# EAGLE board 1-WireCounterPanelized (EAGLE 6.5.0)
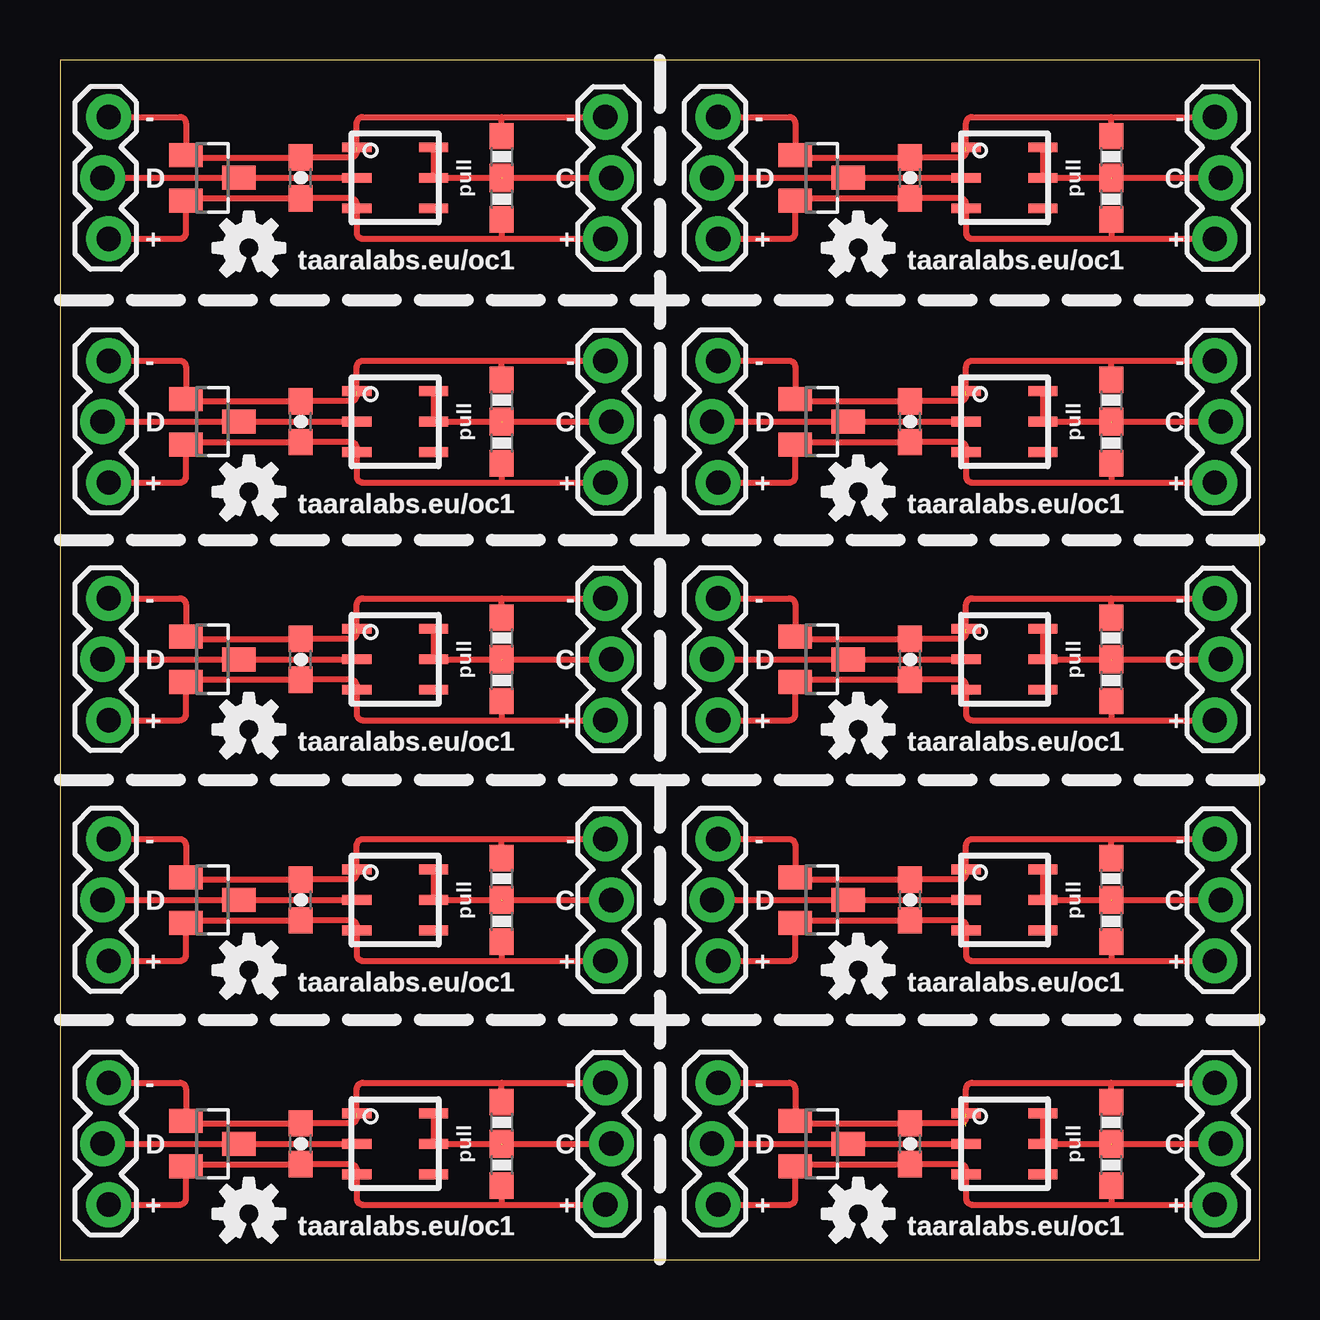
[diagram p0: board, top side]
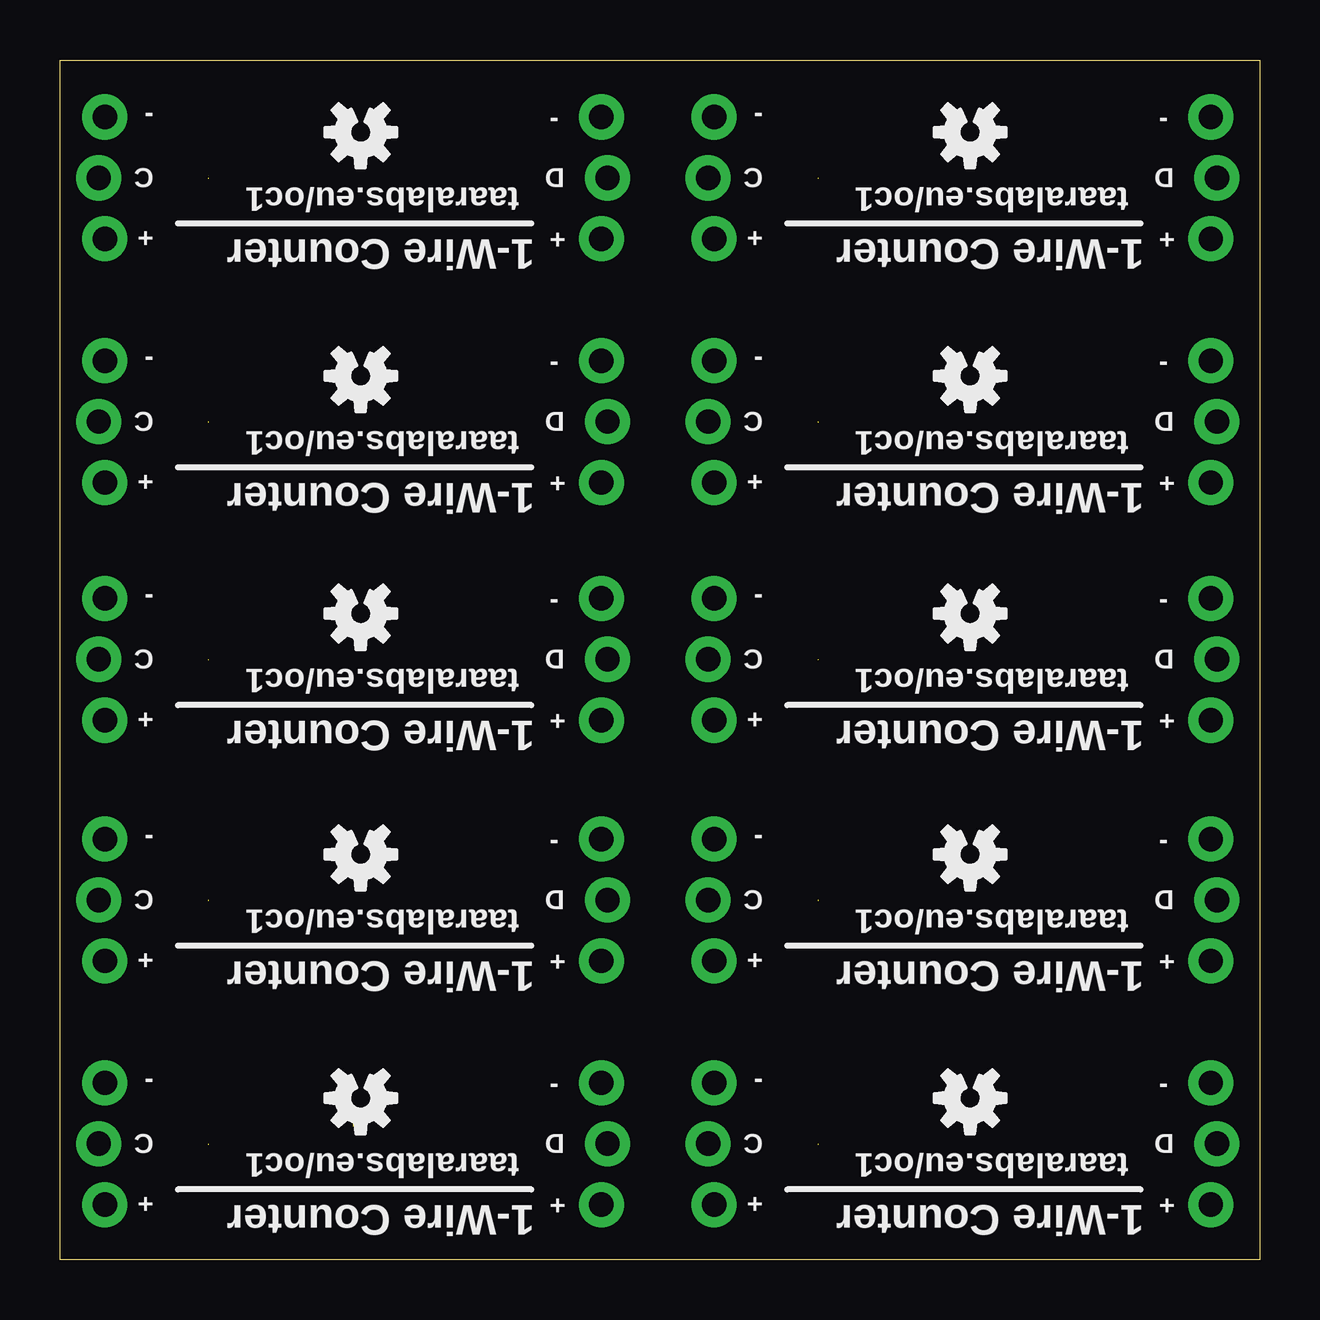
[diagram p1: board, bottom side, seen from below]

Size 50 x 50 mm. Coordinates in mm from the lower left corner, seen from the top.
Outline: 50,0 50,50 0,50 0,0 50,0
Copper layers (1*16): Top 0.035mm / dielectric 1.5mm / Bottom 0.035mm
Design rules "default": minimum track width 10mil, minimum drill 24mil, track to track 8mil, track to pad 8mil, pad to pad 8mil, via to via 8mil, smd to smd 8mil, copper to edge 40mil, drill to drill 8mil, minimum pad ring 10mil, minimum via ring 8mil, stop-mask expansion 4mil, vias tented up to drill 0mil, thermal gap 10mil

## Footprints (pad centres in the part's own frame; a part is rotated, then mirrored left to right if it is on the bottom)
0603-CAP = smd 1.1 x 1: 1 -0.85,0; 2 0.85,0
SOT23 = smd 1 x 1.4: 1 -0.95,-1.1; 2 0.95,-1.1; 3 0,1.1
1X03_LOCK = drill 1.016 pad 1.88: 1 0,0.127; 2 2.54,-0.127; 3 5.08,0.127
0603-RES = smd 1.1 x 1: 1 -0.85,0; 2 0.85,0
TSOC6 = smd 0.406 x 1.219: 1 -1.27,-1.6; 2 0,-1.6; 3 1.27,-1.6; 4 1.27,1.6; 5 0,1.6; 6 -1.27,1.6

## Placement (x,y rotation side)
C1  10u  [0603-CAP]  35.43,4.83 90 top
C2  10u  [0603-CAP]  10.03,4.83 90 top
C3  10u  [0603-CAP]  10.03,14.99 90 top
C4  10u  [0603-CAP]  35.43,14.99 90 top
C5  10u  [0603-CAP]  10.03,25.02 90 top
C6  10u  [0603-CAP]  10.03,34.92 90 top
C7  10u  [0603-CAP]  10.03,45.09 90 top
C8  10u  [0603-CAP]  35.43,25.02 90 top
C9  10u  [0603-CAP]  35.43,34.92 90 top
C10  10u  [0603-CAP]  35.43,45.09 90 top
D1  BAT54S  [SOT23]  6.35,4.83 270 top
D2  BAT54S  [SOT23]  31.75,4.83 270 top
D3  BAT54S  [SOT23]  6.35,14.99 270 top
D4  BAT54S  [SOT23]  31.75,14.99 270 top
D5  BAT54S  [SOT23]  6.35,25.02 270 top
D6  BAT54S  [SOT23]  6.35,34.92 270 top
D7  BAT54S  [SOT23]  6.35,45.09 270 top
D8  BAT54S  [SOT23]  31.75,25.02 270 top
D9  BAT54S  [SOT23]  31.75,34.92 270 top
D10  BAT54S  [SOT23]  31.75,45.09 270 top
JP1  [1X03_LOCK]  1.91,7.37 270 top
JP2  [1X03_LOCK]  22.86,2.29 90 top
JP3  [1X03_LOCK]  27.3,7.37 270 top
JP4  [1X03_LOCK]  48.26,2.29 90 top
JP5  [1X03_LOCK]  1.91,17.53 270 top
JP6  [1X03_LOCK]  22.86,12.45 90 top
JP7  [1X03_LOCK]  27.3,17.53 270 top
JP8  [1X03_LOCK]  48.26,12.45 90 top
JP9  [1X03_LOCK]  1.91,27.56 270 top
JP10  [1X03_LOCK]  22.86,22.48 90 top
JP11  [1X03_LOCK]  1.91,37.47 270 top
JP12  [1X03_LOCK]  22.86,32.38 90 top
JP13  [1X03_LOCK]  1.91,47.62 270 top
JP14  [1X03_LOCK]  22.86,42.55 90 top
JP15  [1X03_LOCK]  27.3,27.56 270 top
JP16  [1X03_LOCK]  48.26,22.48 90 top
JP17  [1X03_LOCK]  27.3,37.47 270 top
JP18  [1X03_LOCK]  48.26,32.38 90 top
JP19  [1X03_LOCK]  27.3,47.62 270 top
JP20  [1X03_LOCK]  48.26,42.55 90 top
R1  up  [0603-RES]  18.41,3.94 270 top
R2  down  [0603-RES]  18.41,5.71 270 top
R3  down  [0603-RES]  43.81,5.71 270 top
R4  up  [0603-RES]  43.81,3.94 270 top
R5  down  [0603-RES]  18.41,15.88 270 top
R6  up  [0603-RES]  18.41,14.1 270 top
R7  down  [0603-RES]  43.81,15.88 270 top
R8  up  [0603-RES]  43.81,14.1 270 top
R9  down  [0603-RES]  18.41,25.91 270 top
R10  up  [0603-RES]  18.41,24.13 270 top
R11  down  [0603-RES]  18.41,35.81 270 top
R12  up  [0603-RES]  18.41,34.04 270 top
R13  down  [0603-RES]  18.41,45.97 270 top
R14  up  [0603-RES]  18.41,44.2 270 top
R15  down  [0603-RES]  43.81,25.91 270 top
R16  up  [0603-RES]  43.81,24.13 270 top
R17  down  [0603-RES]  43.81,35.81 270 top
R18  up  [0603-RES]  43.81,34.04 270 top
R19  down  [0603-RES]  43.81,45.97 270 top
R20  up  [0603-RES]  43.81,44.2 270 top
U$1  [OSHW-LOGO-S]  7.87,1.91 0 top
U$2  DS2423P  [TSOC6]  13.97,4.83 270 top
U$3  [OSHW-LOGO-S]  12.06,6.73 180 bottom
U$4  DS2423P  [TSOC6]  39.37,4.83 270 top
U$5  [OSHW-LOGO-S]  33.27,1.91 0 top
U$6  [OSHW-LOGO-S]  37.47,6.73 180 bottom
U$7  DS2423P  [TSOC6]  13.97,14.99 270 top
U$8  [OSHW-LOGO-S]  7.87,12.06 0 top
U$9  [OSHW-LOGO-S]  12.06,16.89 180 bottom
U$10  DS2423P  [TSOC6]  39.37,14.99 270 top
U$11  [OSHW-LOGO-S]  33.27,12.06 0 top
U$12  [OSHW-LOGO-S]  37.47,16.89 180 bottom
U$13  DS2423P  [TSOC6]  13.97,25.02 270 top
U$14  [OSHW-LOGO-S]  7.87,22.1 0 top
U$15  [OSHW-LOGO-S]  12.06,26.92 180 bottom
U$16  DS2423P  [TSOC6]  13.97,34.92 270 top
U$17  [OSHW-LOGO-S]  7.87,32 0 top
U$18  [OSHW-LOGO-S]  12.06,36.83 180 bottom
U$19  DS2423P  [TSOC6]  13.97,45.09 270 top
U$20  [OSHW-LOGO-S]  7.87,42.16 0 top
U$21  [OSHW-LOGO-S]  12.06,46.99 180 bottom
U$22  DS2423P  [TSOC6]  39.37,25.02 270 top
U$23  [OSHW-LOGO-S]  33.27,22.1 0 top
U$24  [OSHW-LOGO-S]  37.47,26.92 180 bottom
U$25  DS2423P  [TSOC6]  39.37,34.92 270 top
U$26  [OSHW-LOGO-S]  33.27,32 0 top
U$27  [OSHW-LOGO-S]  37.47,36.83 180 bottom
U$28  DS2423P  [TSOC6]  39.37,45.09 270 top
U$29  [OSHW-LOGO-S]  33.27,42.16 0 top
U$30  [OSHW-LOGO-S]  37.47,46.99 180 bottom

## Library data of the parts
C1-C10 = SparkFun-Capacitors
D1-D10 = diode
JP1-JP20 = SparkFun
R1-R20 = SparkFun-Resistors
U$1 U$3 U$5 U$6 U$8 U$9 U$11 U$12 U$14 U$15 U$17 U$18 U$20 U$21 U$23 U$24 U$26 U$27 U$29 U$30 = SparkFun-Aesthetics
U$2 U$4 U$7 U$10 U$13 U$16 U$19 U$22 U$25 U$28 = 1wire

## Nets
GND: C2.2 D1.1 JP1.1 JP2.3 R2.1 U$2.1
GND1: C1.2 D2.1 JP3.1 JP4.3 R3.1 U$4.1
GND2: C3.2 D3.1 JP5.1 JP6.3 R5.1 U$7.1
GND3: C4.2 D4.1 JP7.1 JP8.3 R7.1 U$10.1
GND4: C5.2 D5.1 JP9.1 JP10.3 R9.1 U$13.1
GND5: C6.2 D6.1 JP11.1 JP12.3 R11.1 U$16.1
GND6: C7.2 D7.1 JP13.1 JP14.3 R13.1 U$19.1
GND7: C8.2 D8.1 JP15.1 JP16.3 R15.1 U$22.1
GND8: C9.2 D9.1 JP17.1 JP18.3 R17.1 U$25.1
GND9: C10.2 D10.1 JP19.1 JP20.3 R19.1 U$28.1
N$1: D1.3 JP1.2 U$2.2
N$2: D2.3 JP3.2 U$4.2
N$3: JP4.2 R3.2 R4.1 U$4.5 U$4.6
N$4: D3.3 JP5.2 U$7.2
N$5: JP2.2 R1.1 R2.2 U$2.5 U$2.6
N$6: JP6.2 R5.2 R6.1 U$7.5 U$7.6
N$7: D4.3 JP7.2 U$10.2
N$8: JP8.2 R7.2 R8.1 U$10.5 U$10.6
N$9: D5.3 JP9.2 U$13.2
N$10: JP10.2 R9.2 R10.1 U$13.5 U$13.6
N$11: D6.3 JP11.2 U$16.2
N$12: JP12.2 R11.2 R12.1 U$16.5 U$16.6
N$13: D7.3 JP13.2 U$19.2
N$14: JP14.2 R13.2 R14.1 U$19.5 U$19.6
N$15: D8.3 JP15.2 U$22.2
N$16: JP16.2 R15.2 R16.1 U$22.5 U$22.6
N$17: D9.3 JP17.2 U$25.2
N$18: JP18.2 R17.2 R18.1 U$25.5 U$25.6
N$19: D10.3 JP19.2 U$28.2
N$20: JP20.2 R19.2 R20.1 U$28.5 U$28.6
VCC: C2.1 D1.2 JP1.3 JP2.1 R1.2 U$2.3
VCC1: C1.1 D2.2 JP3.3 JP4.1 R4.2 U$4.3
VCC2: C3.1 D3.2 JP5.3 JP6.1 R6.2 U$7.3
VCC3: C4.1 D4.2 JP7.3 JP8.1 R8.2 U$10.3
VCC4: C5.1 D5.2 JP9.3 JP10.1 R10.2 U$13.3
VCC5: C6.1 D6.2 JP11.3 JP12.1 R12.2 U$16.3
VCC6: C7.1 D7.2 JP13.3 JP14.1 R14.2 U$19.3
VCC7: C8.1 D8.2 JP15.3 JP16.1 R16.2 U$22.3
VCC8: C9.1 D9.2 JP17.3 JP18.1 R18.2 U$25.3
VCC9: C10.1 D10.2 JP19.3 JP20.1 R20.2 U$28.3

## Tracks (layer width: path | path; a pad name or v marks a point on that pad's centre or on a via)
GND  (1 unrouted)
  Top 0.254: 12.37,5.93 arc-90 12.12,5.68 C2.2 5.35,5.68 arc-90 D1.1 5.25,7.11 arc90 5,7.37 JP1.1 | U$2.1 12.37,7.11 arc-90 12.62,7.37 18.41,7.37 | 18.41,7.37 JP2.3 | R2.1 18.41,7.37
GND1  (1 unrouted)
  Top 0.254: 37.77,5.93 arc-90 37.52,5.68 C1.2 30.75,5.68 arc-90 D2.1 30.65,7.11 arc90 30.4,7.37 JP3.1 | U$4.1 37.77,7.11 arc-90 38.02,7.37 43.81,7.37 | 43.81,7.37 JP4.3 | R3.1 43.81,7.37
GND2  (1 unrouted)
  Top 0.254: 12.37,16.09 arc-90 12.12,15.84 C3.2 5.35,15.84 arc-90 D3.1 5.25,17.27 arc90 5,17.53 JP5.1 | U$7.1 12.37,17.27 arc-90 12.62,17.53 18.41,17.53 | 18.41,17.53 JP6.3 | R5.1 18.41,17.53
GND3  (1 unrouted)
  Top 0.254: 37.77,16.09 arc-90 37.52,15.84 C4.2 30.75,15.84 arc-90 D4.1 30.65,17.27 arc90 30.4,17.53 JP7.1 | U$10.1 37.77,17.27 arc-90 38.02,17.53 43.81,17.53 | 43.81,17.53 JP8.3 | R7.1 43.81,17.53
GND4  (1 unrouted)
  Top 0.254: 12.37,26.12 arc-90 12.12,25.87 C5.2 5.35,25.87 arc-90 D5.1 5.25,27.3 arc90 5,27.56 JP9.1 | U$13.1 12.37,27.3 arc-90 12.62,27.56 18.41,27.56 | 18.41,27.56 JP10.3 | R9.1 18.41,27.56
GND5  (1 unrouted)
  Top 0.254: 12.37,36.03 arc-90 12.12,35.77 C6.2 5.35,35.77 arc-90 D6.1 5.25,37.21 arc90 5,37.47 JP11.1 | U$16.1 12.37,37.21 arc-90 12.62,37.47 18.41,37.47 | 18.41,37.47 JP12.3 | R11.1 18.41,37.47
GND6  (1 unrouted)
  Top 0.254: 12.37,46.19 arc-90 12.12,45.94 C7.2 5.35,45.94 arc-90 D7.1 5.25,47.37 arc90 5,47.62 JP13.1 | U$19.1 12.37,47.37 arc-90 12.62,47.62 18.41,47.62 | 18.41,47.62 JP14.3 | R13.1 18.41,47.62
GND7  (1 unrouted)
  Top 0.254: 37.77,26.12 arc-90 37.52,25.87 C8.2 30.75,25.87 arc-90 D8.1 30.65,27.3 arc90 30.4,27.56 JP15.1 | U$22.1 37.77,27.3 arc-90 38.02,27.56 43.81,27.56 | 43.81,27.56 JP16.3 | R15.1 43.81,27.56
GND8  (1 unrouted)
  Top 0.254: 37.77,36.03 arc-90 37.52,35.77 C9.2 30.75,35.77 arc-90 D9.1 30.65,37.21 arc90 30.4,37.47 JP17.1 | U$25.1 37.77,37.21 arc-90 38.02,37.47 43.81,37.47 | 43.81,37.47 JP18.3 | R17.1 43.81,37.47
GND9  (1 unrouted)
  Top 0.254: 37.77,46.19 arc-90 37.52,45.94 C10.2 30.75,45.94 arc-90 D10.1 30.65,47.37 arc90 30.4,47.62 JP19.1 | U$28.1 37.77,47.37 arc-90 38.02,47.62 43.81,47.62 | 43.81,47.62 JP20.3 | R19.1 43.81,47.62
N$1
  Top 0.254: JP1.2 D1.3 U$2.2
N$2
  Top 0.254: JP3.2 D2.3 U$4.2
N$3  (1 unrouted)
  Top 0.254: U$4.6 U$4.5 43.81,4.83 | 43.81,4.83 R3.2 | 43.81,4.83 JP4.2
N$4
  Top 0.254: JP5.2 D3.3 U$7.2
N$5  (1 unrouted)
  Top 0.254: U$2.6 U$2.5 18.41,4.83 | 18.41,4.83 R2.2 | 18.41,4.83 JP2.2
N$6  (1 unrouted)
  Top 0.254: U$7.6 U$7.5 18.41,14.99 | 18.41,14.99 R5.2 | 18.41,14.99 JP6.2
N$7
  Top 0.254: JP7.2 D4.3 U$10.2
N$8  (1 unrouted)
  Top 0.254: U$10.6 U$10.5 43.81,14.99 | 43.81,14.99 R7.2 | 43.81,14.99 JP8.2
N$9
  Top 0.254: JP9.2 D5.3 U$13.2
N$10  (1 unrouted)
  Top 0.254: U$13.6 U$13.5 18.41,25.02 | 18.41,25.02 R9.2 | 18.41,25.02 JP10.2
N$11
  Top 0.254: JP11.2 D6.3 U$16.2
N$12  (1 unrouted)
  Top 0.254: U$16.6 U$16.5 18.41,34.92 | 18.41,34.92 R11.2 | 18.41,34.92 JP12.2
N$13
  Top 0.254: JP13.2 D7.3 U$19.2
N$14  (1 unrouted)
  Top 0.254: U$19.6 U$19.5 18.41,45.09 | 18.41,45.09 R13.2 | 18.41,45.09 JP14.2
N$15
  Top 0.254: JP15.2 D8.3 U$22.2
N$16  (1 unrouted)
  Top 0.254: U$22.6 U$22.5 43.81,25.02 | 43.81,25.02 R15.2 | 43.81,25.02 JP16.2
N$17
  Top 0.254: JP17.2 D9.3 U$25.2
N$18  (1 unrouted)
  Top 0.254: U$25.6 U$25.5 43.81,34.92 | 43.81,34.92 R17.2 | 43.81,34.92 JP18.2
N$19
  Top 0.254: JP19.2 D10.3 U$28.2
N$20  (1 unrouted)
  Top 0.254: U$28.6 U$28.5 43.81,45.09 | 43.81,45.09 R19.2 | 43.81,45.09 JP20.2
S$1  (1 unrouted)
S$2  (1 unrouted)
VCC
  Top 0.254: JP1.3 5,2.29 arc90 5.25,2.54 D1.2 arc-90 5.35,3.98 C2.1 12.12,3.98 arc-90 12.37,3.72 U$2.3 12.37,2.54 arc90 12.62,2.29 18.41,2.29 | 18.41,2.29 JP2.1 | R1.2 18.41,2.29
VCC1
  Top 0.254: JP3.3 30.4,2.29 arc90 30.65,2.54 D2.2 arc-90 30.75,3.98 C1.1 37.52,3.98 arc-90 37.77,3.72 U$4.3 37.77,2.54 arc90 38.02,2.29 43.81,2.29 | 43.81,2.29 JP4.1 | R4.2 43.81,2.29
VCC2
  Top 0.254: JP5.3 5,12.45 arc90 5.25,12.7 D3.2 arc-90 5.35,14.14 C3.1 12.12,14.14 arc-90 12.37,13.88 U$7.3 12.37,12.7 arc90 12.62,12.45 18.41,12.45 | 18.41,12.45 JP6.1 | R6.2 18.41,12.45
VCC3
  Top 0.254: JP7.3 30.4,12.45 arc90 30.65,12.7 D4.2 arc-90 30.75,14.14 C4.1 37.52,14.14 arc-90 37.77,13.88 U$10.3 37.77,12.7 arc90 38.02,12.45 43.81,12.45 | 43.81,12.45 JP8.1 | R8.2 43.81,12.45
VCC4
  Top 0.254: JP9.3 5,22.48 arc90 5.25,22.73 D5.2 arc-90 5.35,24.17 C5.1 12.12,24.17 arc-90 12.37,23.91 U$13.3 12.37,22.73 arc90 12.62,22.48 18.41,22.48 | 18.41,22.48 JP10.1 | R10.2 18.41,22.48
VCC5
  Top 0.254: JP11.3 5,32.38 arc90 5.25,32.64 D6.2 arc-90 5.35,34.08 C6.1 12.12,34.08 arc-90 12.37,33.82 U$16.3 12.37,32.64 arc90 12.62,32.38 18.41,32.38 | 18.41,32.38 JP12.1 | R12.2 18.41,32.38
VCC6
  Top 0.254: JP13.3 5,42.55 arc90 5.25,42.8 D7.2 arc-90 5.35,44.23 C7.1 12.12,44.23 arc-90 12.37,43.98 U$19.3 12.37,42.8 arc90 12.62,42.55 18.41,42.55 | 18.41,42.55 JP14.1 | R14.2 18.41,42.55
VCC7
  Top 0.254: JP15.3 30.4,22.48 arc90 30.65,22.73 D8.2 arc-90 30.75,24.17 C8.1 37.52,24.17 arc-90 37.77,23.91 U$22.3 37.77,22.73 arc90 38.02,22.48 43.81,22.48 | 43.81,22.48 JP16.1 | R16.2 43.81,22.48
VCC8
  Top 0.254: JP17.3 30.4,32.38 arc90 30.65,32.64 D9.2 arc-90 30.75,34.08 C9.1 37.52,34.08 arc-90 37.77,33.82 U$25.3 37.77,32.64 arc90 38.02,32.38 43.81,32.38 | 43.81,32.38 JP18.1 | R18.2 43.81,32.38
VCC9
  Top 0.254: JP19.3 30.4,42.55 arc90 30.65,42.8 D10.2 arc-90 30.75,44.23 C10.1 37.52,44.23 arc-90 37.77,43.98 U$28.3 37.77,42.8 arc90 38.02,42.55 43.81,42.55 | 43.81,42.55 JP20.1 | R20.2 43.81,42.55

## Text on the board
tNames: - | - | - | - | - | - | D | D | pull | C | C | D | D | pull | C | C | + | + | + | + | + | + | + | + | taaralabs.eu/oc1 | taaralabs.eu/oc1 | taaralabs.eu/oc1 | taaralabs.eu/oc1 | - | - | - | - | - | - | D | D | pull | C | C | D | D | pull | C | C | + | + | + | + | + | + | + | + | taaralabs.eu/oc1 | taaralabs.eu/oc1 | taaralabs.eu/oc1 | taaralabs.eu/oc1 | - | - | - | - | - | - | D | D | pull | C | C | D | D | pull | C | C | + | + | + | + | + | + | + | + | taaralabs.eu/oc1 | taaralabs.eu/oc1 | taaralabs.eu/oc1 | taaralabs.eu/oc1 | - | - | - | - | - | - | D | D | pull | C | C | D | D | pull | C | C | + | + | + | + | + | + | + | + | taaralabs.eu/oc1 | taaralabs.eu/oc1 | taaralabs.eu/oc1 | taaralabs.eu/oc1 | - | - | - | - | - | - | D | D | pull | C | C | D | D | pull | C | C | + | + | + | + | + | + | + | + | taaralabs.eu/oc1 | taaralabs.eu/oc1 | taaralabs.eu/oc1 | taaralabs.eu/oc1
bNames: - | - | - | - | D | taaralabs.eu/oc1 | C | D | taaralabs.eu/oc1 | C | + | 1-Wire Counter | + | + | 1-Wire Counter | + | - | - | - | - | D | taaralabs.eu/oc1 | C | D | taaralabs.eu/oc1 | C | + | 1-Wire Counter | + | + | 1-Wire Counter | + | - | - | - | - | D | taaralabs.eu/oc1 | C | D | taaralabs.eu/oc1 | C | + | 1-Wire Counter | + | + | 1-Wire Counter | + | - | - | - | - | D | taaralabs.eu/oc1 | C | D | taaralabs.eu/oc1 | C | + | 1-Wire Counter | + | + | 1-Wire Counter | + | - | - | - | - | D | C | D | C | taaralabs.eu/oc1 | taaralabs.eu/oc1 | + | 1-Wire Counter | + | + | 1-Wire Counter | +